# EAGLE board 3ch mix 1.5 (EAGLE 6.5.0)
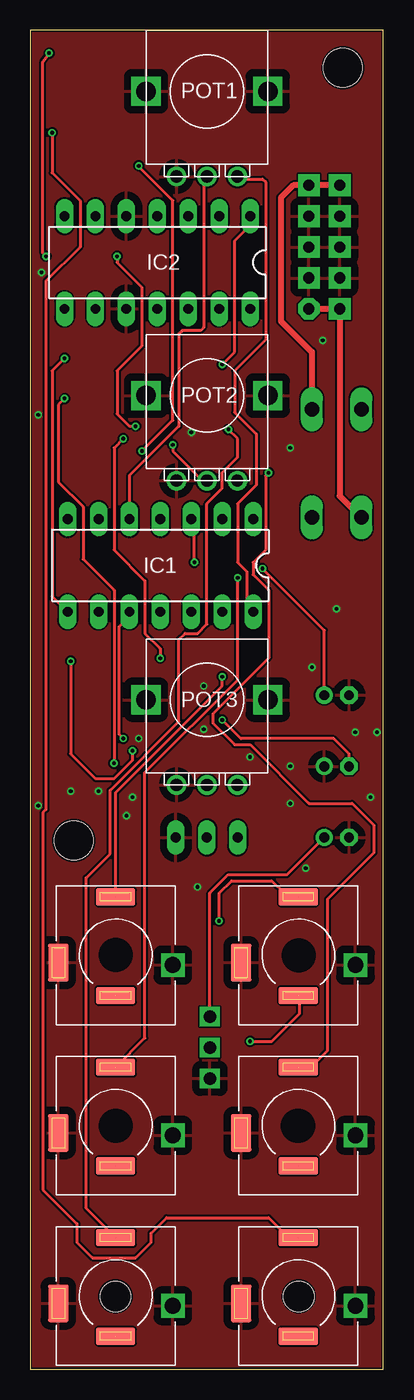
[diagram p0: board, top side]
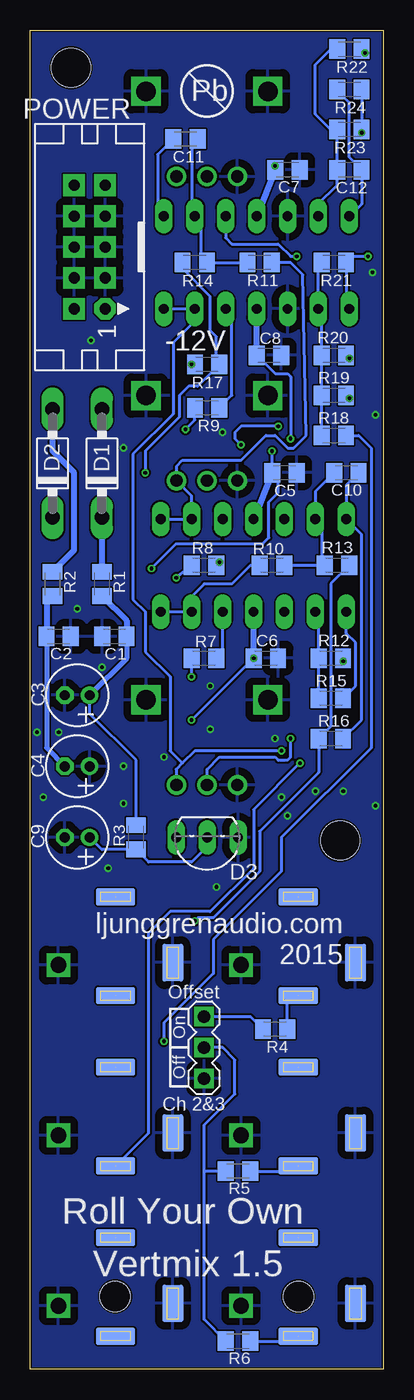
[diagram p1: board, bottom side, seen from below]

Size 29 x 110 mm. Coordinates in mm from the lower left corner, seen from the top.
Outline: 29,0 29,110 0,110 0,0 29,0
Copper layers (1*16): Top 0.035mm / dielectric 1.5mm / Bottom 0.035mm
Design rules "hackvana 12 mil pads 24 mil thermal": minimum track width 6mil, minimum drill 0.3mm, track to track 6mil, track to pad 6mil, pad to pad 6mil, via to via 6mil, smd to smd 0mil, copper to edge 6mil, drill to drill 6mil, minimum pad ring 12mil, minimum via ring 6mil, stop-mask expansion 2mil, vias tented up to drill 100mil, thermal gap 24mil
Holes 2.5 mm at 22.04,5.97 6.99,5.97
Holes 3.2 mm at 25.66,106.93 3.56,43.43
tRestrict: area 5.7,32.8 to 8.3,35.3; area 20.8,32.7 to 23.3,35.2; area 5.7,18.7 to 8.3,21.3; area 20.7,18.7 to 23.2,21.3

## Footprints (pad centres in the part's own frame; a part is rotated, then mirrored left to right if it is on the bottom)
C0805K = smd 1.3 x 1.6: 1 -1,0; 2 1,0
E2-5 = drill 0.813 pad 1.27: + -1.016,0 | drill 0.813 pad 1.27 octagon: - 1.016,0
DO41-7 = drill 1.2 pad 1.6 long: A 4.445,0; C -4.445,0
TO92-LINE = drill 0.813 long: 1 2.54,0; 2 0,0; 3 -2.54,0
DIL14 = drill 0.813 long: 1 -7.62,-3.81; 2 -5.08,-3.81; 3 -2.54,-3.81; 4 0,-3.81; 5 2.54,-3.81; 6 5.08,-3.81; 7 7.62,-3.81; 8 7.62,3.81; 9 5.08,3.81; 10 2.54,3.81; 11 0,3.81; 12 -2.54,3.81; 13 -5.08,3.81; 14 -7.62,3.81
ERTHENVAR-SLOTS = smd 3.2 x 1.4 bottom: NORMLB 0,-3.3; TIPB 0,4.8 | smd 3.2 x 1.4: NORMLT 0,-3.3; TIPT 0,4.8 | smd 1.7 x 3.1 bottom: RING1B -4.7,-0.6 | smd 1.7 x 3.1: RING1T -4.7,-0.6 | drill 1.3 pad 1.778 square: RING2H 4.7,-0.8
MA03-1 = drill 1.016 square: 1 -2.54,0; 2 0,0; 3 2.54,0
POT-ALPHA9 = drill 1.6 pad 2.184 square: GND$1 -5,0; GND$2 5,0 | drill 1: LEFT -2.5,-7; MID 0,-7; RIGHT 2.5,-7
CON10L = drill 0.914 pad 1.778 octagon: 1 5.08,1.27 | drill 0.914 pad 1.778 square: 2 5.08,-1.27; 3 2.54,1.27; 4 2.54,-1.27; 5 0,1.27; 6 0,-1.27; 7 -2.54,1.27; 8 -2.54,-1.27; 9 -5.08,1.27; 10 -5.08,-1.27

## Placement (x,y rotation side)
C1  100nF  [C0805K]  22.11,60.2 180 bottom
C2  100nF  [C0805K]  26.68,60.2 180 bottom
C3  10uF  [E2-5]  25.15,55.37 180 bottom
C4  10uF  [E2-5]  25.15,49.53 180 bottom
C5  100nF  [C0805K]  8.14,73.66 0 bottom
C6  100nF  [C0805K]  9.66,58.42 180 bottom
C7  100nF  [C0805K]  7.88,98.55 0 bottom
C8  100nF  [C0805K]  9.41,83.31 180 bottom
C9  10uF  [E2-5]  25.15,43.69 180 bottom
C10  68pF  [C0805K]  3.06,73.66 180 bottom
C11  68pF  [C0805K]  16.26,101.09 0 bottom
C12  68pF  [C0805K]  2.8,98.55 0 bottom
D1  1N5818  [DO41-7]  23.12,74.42 90 bottom
D2  1N5818  [DO41-7]  27.19,74.42 90 bottom
D3  LM4040 5V  [TO92-LINE]  14.49,43.69 180 bottom
IC1  TL084  [DIL14]  10.68,66.04 180 top
IC2  TL084  [DIL14]  10.42,90.93 180 top
IN1  ERTHENVAR_3.5MM_JACKSLOTS  [ERTHENVAR-SLOTS]  7,34 0 top
IN2  ERTHENVAR_3.5MM_JACKSLOTS  [ERTHENVAR-SLOTS]  7,20 0 top
IN3  ERTHENVAR_3.5MM_JACKSLOTS  [ERTHENVAR-SLOTS]  7,6 0 top
JP1  [MA03-1]  14.74,26.42 90 bottom
OUT1  ERTHENVAR_3.5MM_JACKSLOTS  [ERTHENVAR-SLOTS]  22,34 0 top
OUT2  ERTHENVAR_3.5MM_JACKSLOTS  [ERTHENVAR-SLOTS]  22,20 0 top
OUT3  ERTHENVAR_3.5MM_JACKSLOTS  [ERTHENVAR-SLOTS]  22,6 0 top
POT1  22K  [POT-ALPHA9]  14.5,105 0 top
POT2  22K  [POT-ALPHA9]  14.5,80 0 top
POT3  22K  [POT-ALPHA9]  14.5,55 0 top
POWER  [CON10L]  24.14,92.2 270 bottom
R1  10R  [C0805K]  23.12,64.52 270 bottom
R2  10R  [C0805K]  27.19,64.52 270 bottom
R3  10K  [C0805K]  20.33,43.69 90 bottom
R4  22K  [C0805K]  8.9,27.94 0 bottom
R5  22K  [C0805K]  11.95,16.26 0 bottom
R6  22K  [C0805K]  11.95,2.29 0 bottom
R7  22K  [C0805K]  14.74,58.42 0 bottom
R8  22K  [C0805K]  14.74,66.04 0 bottom
R9  22K  [C0805K]  14.49,78.99 0 bottom
R10  22K  [C0805K]  9.15,66.04 0 bottom
R11  22K  [C0805K]  10.17,90.93 180 bottom
R12  22K  [C0805K]  4.33,58.42 180 bottom
R13  22K  [C0805K]  3.82,66.04 0 bottom
R14  22K  [C0805K]  15.5,90.93 180 bottom
R15  22K  [C0805K]  4.33,55.12 0 bottom
R16  330R  [C0805K]  4.33,51.82 180 bottom
R17  330R  [C0805K]  14.49,82.55 0 bottom
R18  22K  [C0805K]  4.07,76.71 180 bottom
R19  22K  [C0805K]  4.07,80.01 180 bottom
R20  22K  [C0805K]  4.07,83.31 180 bottom
R21  22K  [C0805K]  4.07,90.93 0 bottom
R22  22K  [C0805K]  2.8,108.46 180 bottom
R23  22K  [C0805K]  2.8,101.85 0 bottom
R24  330R  [C0805K]  2.8,105.16 0 bottom

## Library data of the parts
C1-C12 D1-D3 IC1 IC2 IN1-IN3 OUT1-OUT3 POT1-POT3 R1-R24 = Roll Your Own
JP1 POWER = Roll Your Own; OC_FARNELL: unknown; OC_NEWARK: unknown

## Nets
0V: C1.2 C2.1 C3.- C4.+ C5.2 C6.1 C7.2 C8.1 C9.- D3.3 IC2.5 IC2.10 IN1.RING1B IN1.RING1T IN1.RING2H IN2.RING1B IN2.RING1T IN2.RING2H IN3.RING1B IN3.RING1T IN3.RING2H JP1.1 OUT1.RING1B OUT1.RING1T OUT1.RING2H OUT2.RING1B OUT2.RING1T OUT2.RING2H OUT3.RING1B OUT3.RING1T OUT3.RING2H POT1.GND$1 POT1.GND$2 POT1.LEFT POT2.GND$1 POT2.GND$2 POT2.LEFT POT3.GND$1 POT3.GND$2 POT3.LEFT POWER.3 POWER.4 POWER.5 POWER.6 POWER.7 POWER.8
+12V: C1.1 C3.+ C5.1 C7.1 IC1.4 IC2.4 R1.2 R3.2
-12V: C2.2 C4.- C6.2 C8.2 IC1.11 IC2.11 R2.2
N$1: D1.A POWER.9 POWER.10
N$2: D2.C POWER.1 POWER.2
N$3: IC2.8 R21.2 R22.1
N$4: C12.1 IC2.6 R22.2 R23.1
N$5: D1.C R1.1
N$6: D2.A R2.1
N$7: C9.+ D3.2 JP1.3 R3.1 R4.1
N$8: OUT1.TIPB OUT1.TIPT R13.2 R16.2
N$9: IC1.12 R7.2
N$10: IC1.3 R8.2
N$11: IC2.12 R9.2
N$12: IC1.13 IC1.14 POT1.RIGHT R10.1
N$13: IC1.1 IC1.2 POT2.RIGHT R11.1
N$14: IC2.13 IC2.14 POT3.RIGHT R12.1
N$15: C10.2 IC1.6 R10.2 R13.1
N$16: IC1.5 POT1.MID
N$17: IC2.3 POT2.MID
N$18: IC1.10 POT3.MID
N$19: OUT2.TIPB OUT2.TIPT R14.2 R17.2
N$20: IN1.TIPB IN1.TIPT R7.1
N$21: C11.2 IC2.2 R11.2 R14.1
N$22: IC1.9 R12.2 R15.1
N$23: OUT3.TIPB OUT3.TIPT R23.2 R24.2
N$24: IN2.TIPB IN2.TIPT R8.1
N$25: IC1.8 R15.2 R20.1
N$26: OUT1.NORMLB OUT1.NORMLT R18.1
N$27: OUT2.NORMLB OUT2.NORMLT R19.1
N$28: IC2.9 R18.2 R19.2 R20.2 R21.1
N$29: C12.2 IC2.7 R24.1
N$30: IN1.NORMLB IN1.NORMLT R4.2
N$31: IN2.NORMLB IN2.NORMLT R5.2
N$32: IN3.NORMLB IN3.NORMLT R6.2
N$33: JP1.2 R5.1 R6.1
N$34: IN3.TIPB IN3.TIPT R9.1
N$35: C10.1 IC1.7 R16.1
N$36: C11.1 IC2.1 R17.1

## Tracks (layer width: path | path; a pad name or v marks a point on that pad's centre or on a via)
0V  (via drill 0.3)
  other vias: 23.12,57.66 26.68,52.32 28.46,52.32 25.15,62.48 27.95,46.99 21.34,49.53 21.34,46.48 22.61,41.15 13.72,39.62 18.04,50.29 14.23,52.58 8.9,51.82 8.39,46.99 7.88,45.47 5.6,47.5 3.31,47.5 21.34,75.69 13.22,76.96 14.23,56.13 0.64,46.29 0.64,78.42 0.9,90.11 24.01,84.52
  pour Bottom: -0.25,110.24 29.22,110.24 29.22,-0.25 -0.25,-0.25
  pour Top: -0.25,110.24 29.22,110.24 29.22,-0.25 -0.25,-0.25
+12V  (via drill 0.3)
  Top 0.254: v9.15,75.44 11.69,77.98 11.69,96.01 8.9,98.81 v8.9,98.87 | C3.+ 24.14,60.71 v19.06,65.79
  Bottom 0.254: R3.2 20.33,50.04 24.14,53.85 C3.+ | v9.15,75.44 9.14,75.42 C5.1 8.64,73.17 8.64,72.01 9.41,71.25 9.41,68.33 9.91,67.82 17.03,67.82 v19.06,65.79 | v8.9,98.87 8.88,98.79 C7.1
  Bottom 0.4: C1.1 21.11,58.4 C3.+
  Bottom 0.5: R1.2 21.11,61.5 C1.1 | C5.1 IC1.4 | C7.1 IC2.4
-12V  (via drill 0.3)
  Top 0.254: C4.- 26.17,50.55 24.9,51.82 17.28,51.82 v15.76,53.34 | v7.63,76.45 6.87,75.69 6.87,67.31 9.41,64.77 9.41,60.45 10.66,59.2 C6.2
  Bottom 0.254: v15.76,53.34 11.06,58.04 | 11.06,58.04 10.68,58.42 C6.2 11.04,58.04 11.06,58.04 | C8.2 8.88,81.79 7.88,81.79 7.63,81.53 v7.63,76.45
  Bottom 0.4: C2.2 27.68,51.04 C4.-
  Bottom 0.5: R2.2 27.68,63.02 C2.2 | C6.2 IC1.11 | C8.2 IC2.11
  other vias: 10.66,58.42
N$1
  Top 0.5: POWER.10 POWER.9 21.6,97.28 20.58,96.27 20.58,86.11 23.12,83.57 D1.A
N$2
  Top 0.5: POWER.1 POWER.2 25.41,71.75 D2.C
N$3  (via drill 0.3)
  Top 0.254: v1.28,91.44 1.02,91.69 1.02,107.44 v1.53,108.14
  Bottom 0.254: IC2.8 3.07,87.39 R21.2 2.56,91.44 v1.28,91.44 | 1.8,108.22 R22.1 1.53,108.19 v1.53,108.14
N$4
  Bottom 0.254: IC2.6 5.34,95.76 3.8,97.3 C12.1 R23.1 4.33,101.85 5.6,103.12 5.6,107.19 4.33,108.46 R22.2
N$5
  Bottom 0.5: D1.C R1.1
N$6
  Bottom 0.5: R2.1 25.41,67.29 25.41,73.66 27.19,75.44 D2.A
N$7
  Top 0.254: JP1.3 14.74,39.12 16.26,40.64 21.09,40.64 C9.+
  Bottom 0.254: R4.1 10.91,28.96 JP1.3 | C9.+ 23.14,42.69 R3.1 19.3,41.66 15.76,41.66 14.49,42.93 D3.2
N$8  (via drill 0.3)  (1 unrouted)
  Top 0.254: v15.5,36.83 15.5,39.12 16.52,40.13 19.82,40.13 20.84,39.12 21.68,39.12 OUT1.TIPB
  Bottom 0.254: R13.2 4.33,64.53 4.33,52.82 R16.2 5.33,49.04 10.17,44.2 10.17,40.89 13.98,37.08 15.25,37.08 v15.5,36.83
N$9
  Bottom 0.254: R7.2 13.22,58.94 IC1.12
N$10  (via drill 0.3)
  Top 0.254: v13.47,66.29 13.47,69.6 IC1.3
  Bottom 0.254: R8.2 13.72,66.04 v13.47,66.29
N$11
  Bottom 0.254: R9.2 12.45,80.03 12.45,86.11 12.96,86.61 IC2.12
N$12
  Top 0.254: POT1.RIGHT 17.21,97.79 19.06,97.79 19.31,97.54 19.31,84.58 16.77,82.04 16.77,78.61 18.55,76.83 18.55,72.64 17.03,71.12 17.03,66.29 17.79,65.53 17.79,62.74 IC1.14
  Bottom 0.254: IC1.14 IC1.13 15.76,63.5 14.74,64.52 12.45,64.52 10.93,66.04 R10.1
N$13
  Bottom 0.254: IC1.1 IC1.2 15.76,71.76 POT2.RIGHT 17,74.19 16.52,74.68 11.69,74.68 9.66,76.71 8.9,76.71 7.88,75.69 7.37,75.69 6.36,76.71 6.61,89.92 7.63,90.93 R11.1
N$14  (via drill 0.3)
  Top 0.254: v3.31,58.17 3.31,50.55 5.34,48.51 6.87,48.51 8.39,50.04 v8.39,50.8
  Bottom 0.254: IC2.14 IC2.13 15.5,86.11 17.28,84.33 17.28,78.49 20.58,75.18 20.58,63.25 19.57,62.23 19.57,58.93 17.53,56.9 17.53,50.8 16.52,49.78 | R12.1 3.33,58.18 v3.31,58.17 | v8.39,50.8 15.5,50.8 16.52,49.78 | 16.52,49.78 17.03,49.28 17.03,48.03 POT3.RIGHT
N$15
  Bottom 0.254: C10.2 5.6,72.12 IC1.6 5.09,69.34 5.09,66.55 4.82,66.28 R13.1 R10.2
N$16
  Top 0.254: POT1.MID 14.23,97.73 14.23,85.6 13.98,85.34 12.45,85.34 12.2,85.09 12.2,77.47 8.14,73.41 IC1.5
N$17  (via drill 0.3)
  Top 0.254: v7.12,91.44 7.12,90.93 9.15,88.9 9.15,84.07 7.12,82.04 7.12,78.49 8.14,77.47 v8.64,77.47 | v11.69,75.95 11.69,75.44 13.98,73.15 14.35,73.15 POT2.MID
  Bottom 0.254: IC2.3 12.96,92.96 12.45,92.46 8.64,92.46 7.63,91.44 v7.12,91.44 | v8.64,77.47 11.69,77.47 12.2,76.96 12.2,76.45 v11.69,75.95
N$18  (via drill 0.3)
  Top 0.254: v7.63,51.82 7.31,52.13 7.31,61.02 8.14,61.85 IC1.10
  Bottom 0.254: POT3.MID 14.49,48.01 14.49,49.28 13.47,50.29 8.9,50.29 8.64,50.04 7.88,50.04 7.63,50.29 v7.63,51.82
N$19  (via drill 0.3)  (1 unrouted)
  Top 0.254: v19.57,73.66 19.31,73.41 19.31,67.31 18.3,66.29 18.3,65.28 19.57,64.01 19.57,58.42 14.99,53.85 14.99,53.09 16.77,51.31 18.04,51.31 22.87,46.48 26.42,46.48 28.2,44.7 28.2,42.42 24.39,38.61 24.39,26.16 23.03,24.8 OUT2.TIPB
  Bottom 0.254: R14.2 16.5,90.41 14.23,88.14 14.23,85.34 13.72,84.84 13.72,82.79 R17.2 15.26,80.77 16.01,80.77 16.77,80.01 16.77,78.23 19.57,75.44 v19.57,73.66
N$20  (via drill 0.3)  (1 unrouted)
  Top 0.254: IN1.TIPT 7,47.38 15.76,56.13 v15.76,56.9
  Bottom 0.254: v15.76,56.9 15.74,56.91 R7.1
N$21
  Bottom 0.254: C11.2 15.76,100.6 15.76,95.76 15.5,95.5 IC2.2 14.99,94.23 14.99,91.44 14.5,90.95 | 14.5,90.95 R14.1 | 14.5,90.95 14.49,90.93 R11.2
N$22
  Bottom 0.254: R15.1 R12.2 5.33,61.96 IC1.9
N$23  (via drill 0.3)  (1 unrouted)
  Top 0.254: v1.79,101.6 1.79,98.3 4.07,96.01 4.07,92.2 1.28,89.41 1.28,45.97 1.02,45.72 1.02,14.73 3.82,11.94 3.82,10.41 5.09,9.14 8.64,9.14 9.91,10.41 9.91,11.18 11.18,12.45 19.57,12.45 20.84,11.18 21.62,11.18 OUT3.TIPT
  Bottom 0.254: R24.2 R23.2 1.79,101.84 v1.79,101.6
N$24  (via drill 0.3)  (1 unrouted)
  Top 0.254: IN2.TIPT 9.41,27.21 9.41,49.02 17.03,56.64 v17.03,65.02
  Bottom 0.254: v17.03,65.02 17.01,65.02 R8.1
N$25  (via drill 0.3)
  Top 0.254: v2.8,83.06 1.79,82.04 1.79,63.5 IC1.8
  Bottom 0.254: R15.2 2.29,56.15 2.29,59.69 3.06,60.45 IC1.8 | R20.1 3.06,83.31 v2.8,83.06
N$26  (via drill 0.3)  (1 unrouted)
  Top 0.254: v18.04,26.92 19.82,26.92 22.11,29.21 22.11,30.59 OUT1.NORMLT
  Bottom 0.254: R18.1 2.04,76.71 1.02,75.69 1.02,51.05 8.39,43.69 8.39,40.89 13.98,35.31 13.98,32.51 18.04,28.45 v18.04,26.92
N$27  (via drill 0.3)  (1 unrouted)
  Top 0.254: v2.8,79.76 2.29,79.25 2.29,72.9 4.33,70.87 4.33,66.55 6.87,64.01 v6.87,49.78
  Bottom 0.254: R19.1 3.06,80.01 v2.8,79.76 | v6.87,49.78 10.68,45.97 10.68,41.15 14.23,37.59 17.53,37.59 19.31,35.81 19.31,19.39 OUT2.NORMLT
N$28
  Bottom 0.254: R18.2 R19.2 R20.2 5.07,86.85 IC2.9 5.34,90.66 R21.1
N$29
  Bottom 0.254: IC2.7 1.8,95.74 C12.2 1.8,98.57 2.8,99.57 2.8,104.08 3.5,104.78 3.8,105.14 R24.1
N$30  (1 unrouted)
  Bottom 0.254: R4.2 7.9,30.46 7.63,30.73 7.03,30.73 IN1.NORMLT
N$31  (1 unrouted)
  Bottom 0.254: R5.2 7.44,16.26 IN2.NORMLT
N$32  (1 unrouted)
  Bottom 0.254: R6.2 7.41,2.29 IN3.NORMLT
N$33
  Bottom 0.254: R6.1 14.74,4.08 14.74,16.26 | 14.74,16.26 14.74,20.07 12.2,22.61 12.2,25.4 13.22,26.42 JP1.2 | R5.1 14.74,16.26
N$34  (via drill 0.3)  (1 unrouted)
  Top 0.254: IN3.TIPT 4.59,13.21 4.59,40.37 | 4.59,40.37 4.58,40.39 | 4.59,40.37 6.55,42.33 6.55,47.56 12.2,53.21 12.2,59.94 12.71,60.45 13.72,60.45 14.49,61.21 14.49,71.12 15.76,72.39 15.76,73.66 17.03,74.93 17.03,76.45 v16.26,77.22
  Bottom 0.254: v16.26,77.22 15.49,77.99 R9.1
N$35
  Bottom 0.254: C10.1 3.06,72.66 IC1.7 1.79,68.58 1.79,53.36 R16.1
N$36  (via drill 0.3)
  Top 0.254: v15.76,82.55 16.77,83.57 16.77,92.71 18.04,93.98 IC2.1
  Bottom 0.254: C11.1 18.55,99.81 18.55,95.5 18.04,95 IC2.1 | R17.1 v15.76,82.55

## Text on the board
bPlace: Pb | -12V | ljunggrenaudio.com / 2015 | Offset | On | Off | Ch 2&3 | Roll Your Own | Vertmix 1.5